# Altium PCB CANDAQ.PcbDoc (part 2 of 2)
Units mm, origin at the board's own origin, x right, y up, seen from the top; angles counter-clockwise.
Board outline 156.2 x 85.4 mm, 2 copper layers (Top Layer, Bottom Layer); 108 components, 143 nets, 695 pads, 135 vias.
Unrouted connection lines stored in the file: 92.
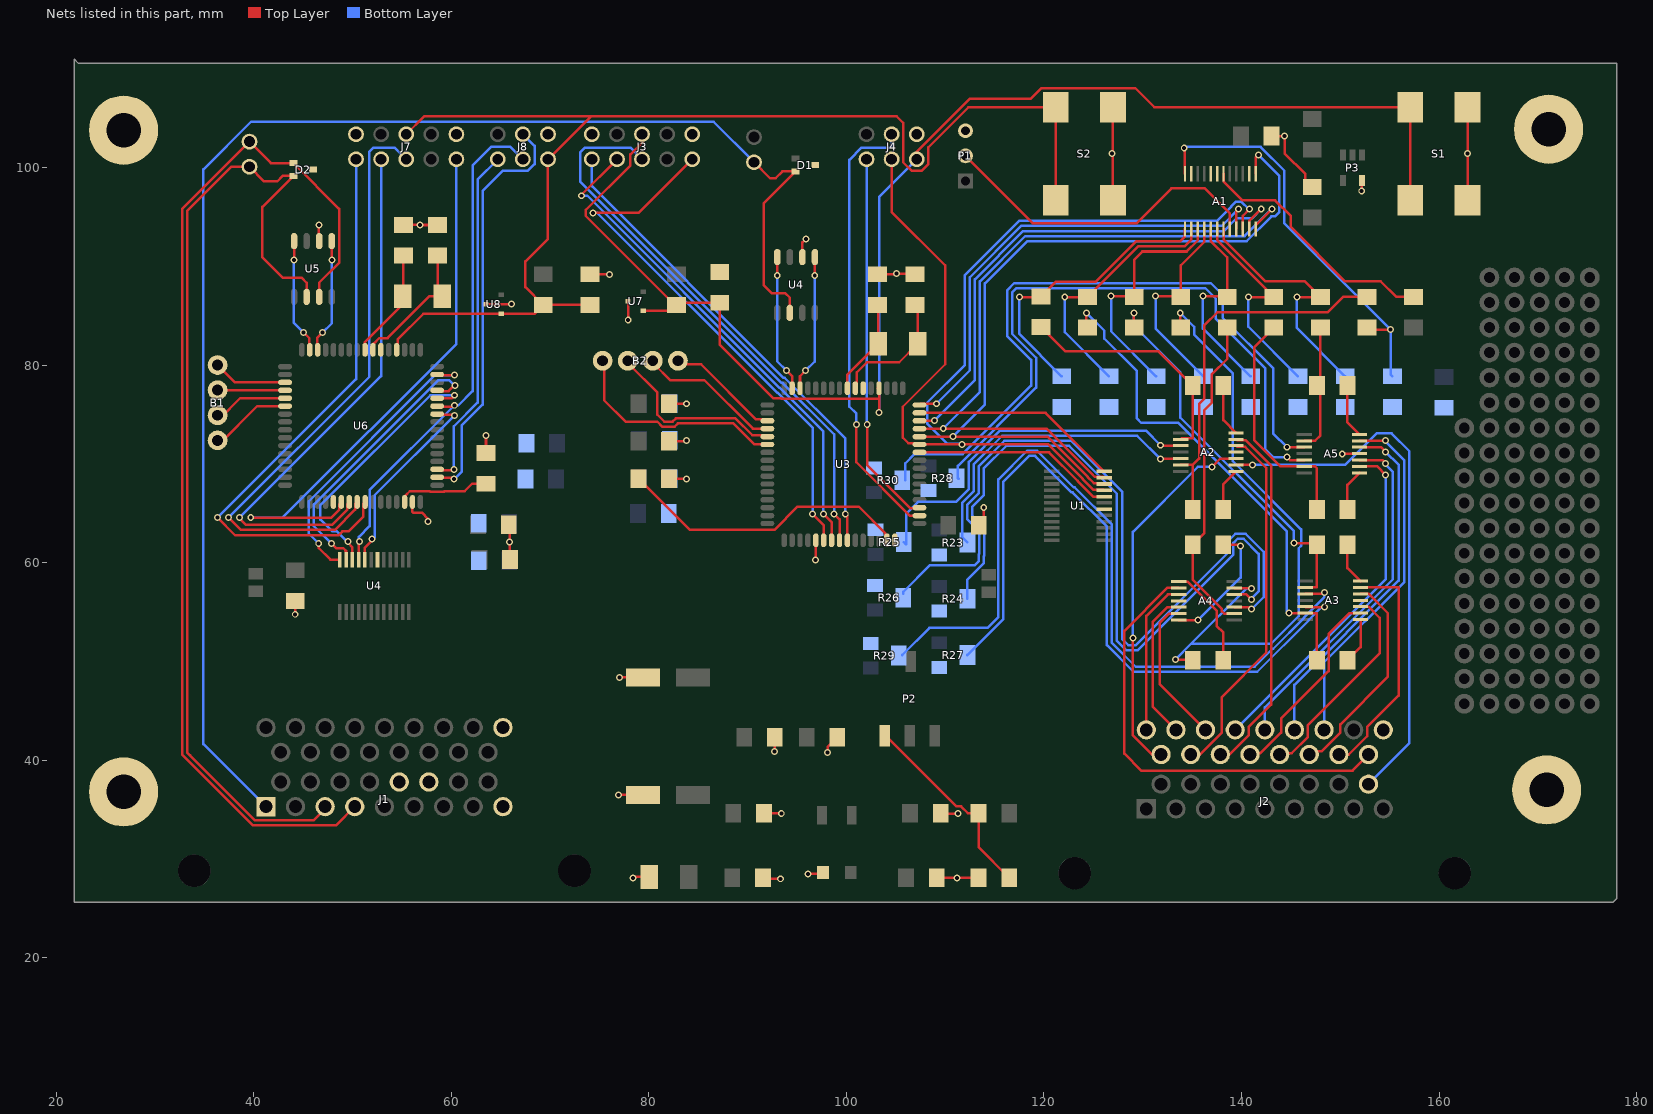
[diagram p2: the nets of this part, all layers, seen from the top]

## Via types
v1: diameter 0.7, hole 0.4, Top Layer to Bottom Layer, 135 vias

## Nets (pads, with @x,y where several pads share a name; then routed paths per layer and width w, separated by ;. In a path a pad name is that pad's centre, name@x,y a point inside that pad or via, vN(x,y) a via of type N, cw(c..) or ccw(c..) an arc to the next point about the centre after c; other vN are vias at no path point) (continued)
CAN_H_2: D2.1 J1.4 J5.1 U5.7 | length 107.7
  Top Layer w0.254: U5.7@46.606,86.92 46.606,88.351 48.627,90.372 48.627,95.834 D2.1@43.993,100.468 41.723,100.468 J5.1@39.548,102.643 32.729,95.824 32.729,40.583 39.87,33.442 48.349,33.442 J1.4@50.213,35.306
CAN_L: D1.2 J1.1 J6.2 U4.6@94.265,85.305 | length 149.3
  Top Layer w0.254: J6.2@90.635,100.559 92.26,98.934 92.821,98.934 93.511,99.624 D1.2@94.842,99.624 91.604,96.386 91.604,88.13 92.428,87.306 93.793,87.306 94.265,86.834 U4.6@94.265,85.305
  Bottom Layer w0.254: J1.1@41.213,35.306 34.883,41.636 34.883,99.831 39.708,104.656 86.538,104.656 J6.2@90.635,100.559
CAN_L_2: D2.2 J1.3 J5.2 U5.6 | length 102.3
  Top Layer w0.254: U5.6@45.336,86.92 45.336,88.354 44.814,88.876 42.911,88.876 40.865,90.922 40.865,96.04 D2.2@43.993,99.168 42.914,99.168 42.36,98.614 41.037,98.614 J5.2@39.548,100.103 37.726,100.103 33.237,95.614 33.237,40.793 33.244,40.793 33.542,40.496 33.542,40.488 40.08,33.95 46.074,33.95 47.006,34.882 47.006,35.099 J1.3@47.213,35.306
CAN_RX: U3.31 U4.4@92.995,90.955 | length 13.9
  Top Layer w0.254: v1(92.993,89.087) 92.995,89.089 U4.4@92.995,90.955 ; v1(93.94,79.452) 94.495,78.897 U3.31@94.495,77.677
  Bottom Layer w0.254: v1(92.993,89.087) 92.993,80.399 v1(93.94,79.452)
CAN_RX_2: U5.4 U6.31 | length 11.7
  Top Layer w0.254: v1(44.049,90.675) 44.066,90.692 U5.4@44.066,92.57 ; v1(45.032,83.315) 45.6,82.747 U6.31@45.6,81.487
  Bottom Layer w0.254: v1(44.049,90.675) 44.049,84.298 v1(45.032,83.315)
CAN_TX: U3.30 U4.1@96.805,90.955 | length 13.9
  Top Layer w0.254: U3.30@95.295,77.677 95.295,78.881 v1(95.866,79.452) ; v1(96.787,89.087) 96.805,89.105 U4.1@96.805,90.955
  Bottom Layer w0.254: v1(95.866,79.452) 96.787,80.373 v1(96.787,89.087)
CAN_TX_2: U5.1 U6.30 | length 11.7
  Top Layer w0.254: U6.30@46.4,81.487 46.4,82.757 v1(46.958,83.315) ; U5.1@47.876,92.57 47.876,90.695 v1(47.896,90.675)
  Bottom Layer w0.254: v1(46.958,83.315) 47.896,84.253 v1(47.896,90.675)
D_0: B2.0 U3.35 | length 11.3
  Top Layer w0.254: B2.0@83.08,80.1 85.278,80.1 90.857,74.521 91.851,74.521 U3.35@91.995,74.377
D_0_2: B1.0 U6.35 | length 7.2
  Top Layer w0.254: B1.0@36.6,79.74 38.081,78.259 U6.35@43.154,78.259
D_1: B2.1 U3.36 | length 14.2
  Top Layer w0.254: B2.1@80.54,80.1 82.14,78.5 85.6,78.5 90.523,73.577 U3.36@91.995,73.577
D_1_2: B1.1 U6.36 | length 6.7
  Top Layer w0.254: B1.1@36.6,77.2 36.859,77.459 U6.36@43.154,77.459
D_2: B2.2 U3.37 | length 18.6
  Top Layer w0.254: B2.2@78,80.1 80.861,77.239 80.861,74.986 81.547,74.3 82.4,74.3 82.721,74.621 88.76,74.621 90.461,72.921 91.851,72.921 U3.37@91.995,72.777
D_2_2: B1.2 U6.37 | length 7.4
  Top Layer w0.254: B1.2@36.6,74.66 38.599,76.659 U6.37@43.154,76.659
D_3: B2.3 U3.38 | length 22.3
  Top Layer w0.254: B2.3@75.46,80.1 75.46,76.458 77.632,74.286 80.843,74.286 81.337,73.792 82.61,73.792 82.932,74.113 88.55,74.113 90.686,71.977 U3.38@91.995,71.977
D_3_2: B1.3 U6.38 | length 8.1
  Top Layer w0.254: B1.3@36.6,72.12 40.339,75.859 U6.38@43.154,75.859
GND: A1.14 A1.19 A1.20 A1.23 A2.4 A3.4 A4.4 A5.4 C3.2 C4.1 C5.1 C6.2 C7.1 C8.1 C9.2 C10.2 C11.1 C12.1 C13.1 C14.2 C15.2 C16.2 C17.2 C18.2 C19.1 C20.1 C21.1 C22.1 C23.1 C24.1 C25.2 C26.1 C27.2 C28.1 C29.1@136.146,75.78 C29.2@113.4,63.8 C30.1 C31.1@145.715,75.78 C31.2@44.196,56.134 C32.2 C33.1 C34.1 C35.2 C36.1 C37.1 C38.2 C39.2 C40.1 C41.1 D1.3 D2.3 D3.2 D4.2 J1.9 J1.14 J1.15 J1.34 J2.34 J3.2 J3.10 J4.6 J7.2 J7.10 J8.6 P1.3 P3.5 pad.95 R3.1 R23.1 R24.1 R25.2 R26.2 R27.1 R28.1 R29.2 R30.2 S1.2 S2.2 U1.18 U3.22 U3.53 U3.63 U4.2@95.535,90.955 U4.18 U5.2 U6.22 U6.53 U6.63 U7.3 U8.3 | length 87.1
  Top Layer w0.254: v1(44.182,54.782) 44.196,54.796 C31.2@44.196,56.134 ; v1(46.582,94.182) 46.582,92.594 U5.2@46.606,92.57 ; C41.1@55.145,94.21 56.821,94.21 v1(56.832,94.2) 58.591,94.2 C40.1@58.601,94.21 ; U6.63@56.054,66.159 56.054,65.165 56.141,65.078 57.004,65.078 57.644,64.438 v1(57.644,64.185) ; C33.1@63.5,71.1 v1(63.5,72.9) ; U8.3@63.5,86.161 66.061,86.161 v1(66.1,86.2) ; C35.2@65.8,63.856 65.9,63.756 v1(65.9,62.1) 65.929,62.071 C34.1@65.929,60.334 ; C32.2@74.041,89.206 75.994,89.206 v1(76,89.2) ; v1(76.9,36.5) 76.91,36.49 C19.1@79.38,36.49 ; v1(77,48.4) 77.01,48.39 C20.1@79.38,48.39 ; U7.3@77.88,86.48 77.9,86.46 v1(77.9,84.6) ; v1(78.4,28.1) 78.49,28.19 D4.2@80.035,28.19 ; C4.1@82.042,68.516 83.784,68.516 v1(83.8,68.5) ; C5.1@82.042,72.305 83.705,72.305 v1(83.8,72.4) ; C6.2@82.042,76.094 83.794,76.094 v1(83.8,76.1) ; C17.2@91.54,28.107 91.647,28 v1(93.3,28) ; C16.2@91.64,34.632 93.368,34.632 v1(93.4,34.6) ; v1(92.7,40.9) 92.74,40.94 C18.2@92.74,42.33 ; U4.2@95.535,90.955 95.535,92.435 v1(95.9,92.8) ; v1(96.1,28.5) 97.51,28.5 D3.2@97.64,28.63 ; v1(96.882,60.282) 96.895,60.295 U3.53@96.895,62.277 ; v1(98.1,40.8) 98.1,41.359 C15.2@99.071,42.33 ; C12.1@103.151,89.206 105.006,89.206 v1(105.082,89.282) 106.858,89.282 C11.1@106.934,89.206 ; C13.1@109.14,28.107 111.193,28.107 v1(111.2,28.1) 113.37,28.1 R3.1@113.377,28.107 ; C14.2@109.54,34.632 109.572,34.6 v1(111.3,34.6) ; C29.2@113.4,63.8 113.9,64.3 v1(113.9,65.6) ; S2.2@126.987,96.724 126.987,101.313 v1(126.872,101.428) 126.987,101.543 S2.2@126.987,106.124 ; C25.2@143.041,103.201 144.345,103.201 v1(144.372,103.228) 144.372,101.445 146.461,99.356 146.461,98.738 C21.1@147.153,98.046 ; v1(150.2,71) 150.25,71.05 A5.4@151.95,71.05 ; v1(152.172,97.628) 152.194,97.65 P3.5@152.194,98.696 ; S1.2@162.886,96.722 S1.2@162.886,106.122
  other v1: 162.872,101.428
ISP_MISO: J4.1 U3.3 | length 38.1
  Top Layer w0.254: v1(102.1,74) 102.1,69.878 106.478,65.5 107.03,65.5 U3.3@107.251,65.721
  Bottom Layer w0.254: J4.1@102.032,100.853 102.032,74.068 v1(102.1,74)
ISP_MISO_2: J8.1 U6.3 | length 35
  Top Layer w0.254: U6.3@58.5,69.387 60.188,69.387 v1(60.252,69.451)
  Bottom Layer w0.254: v1(60.252,69.451) 60.252,73.823 62.652,76.223 62.652,98.811 J8.1@64.694,100.853
ISP_MOSI: J4.4 U3.2 | length 45.7
  Top Layer w0.254: v1(101,74) 101,70.178 106.401,64.777 U3.2@107.395,64.777
  Bottom Layer w0.254: v1(101,74) 101,75.1 100.3,75.8 100.3,100.791 101.543,102.034 104.524,102.034 104.572,102.082 J4.4@104.572,103.393
ISP_MOSI_2: J8.4 U6.2 | length 42.1
  Top Layer w0.254: U6.2@58.5,68.587 60.141,68.587 v1(60.251,68.477)
  Bottom Layer w0.254: v1(60.251,68.477) 60.311,68.477 61.03,69.196 61.03,73.883 63.16,76.013 63.16,97.649 65.183,99.672 67.723,99.672 68.415,100.364 68.415,102.212 J8.4@67.234,103.393
NetA1_1: A1.1 C22.2 R13.1 | length 29.9
  Top Layer w0.254: v1(117.5,86.9) 119.637,86.9 R13.1@119.701,86.964 121.208,88.471 125.255,88.471 129.317,92.533 133.757,92.533 134.278,93.054 A1.1@134.278,93.803
  Bottom Layer w0.254: v1(117.5,86.9) 117.5,83.174 C22.2@121.794,78.88
NetA1_2: A1.2 C26.2 R17.2 | length 26.2
  Top Layer w0.254: v1(122.1,86.9) 124.403,86.9 R17.2@124.416,86.913 129.528,92.025 134.23,92.025 134.928,92.723 A1.2@134.928,93.803
  Bottom Layer w0.254: v1(122.1,86.9) 122.1,83.358 C26.2@126.578,78.88
NetA1_3: A1.3 C28.2 R18.2 | length 24.6
  Top Layer w0.254: v1(126.8,87) 129.044,87 R18.2@129.131,86.913 129.131,90.675 129.973,91.517 134.44,91.517 135.578,92.655 A1.3@135.578,93.803
  Bottom Layer w0.254: v1(126.8,87) 126.8,83.442 C28.2@131.362,78.88
NetA1_4: A1.4 C29.2@136.146,78.88 R19.2 | length 20.6
  Top Layer w0.254: v1(131.3,87) 133.759,87 R19.2@133.846,86.913 133.846,90.11 136.228,92.492 A1.4@136.228,93.803
  Bottom Layer w0.254: v1(131.3,87) 131.3,83.726 C29.2@136.146,78.88
NetA1_5: A1.5 C30.2 R20.2 | length 20.2
  Top Layer w0.254: v1(136.1,87) 138.473,87 R20.2@138.561,86.913 138.561,90.909 136.878,92.592 A1.5@136.878,93.803
  Bottom Layer w0.254: v1(136.1,87) 136.1,83.71 C30.2@140.93,78.88
NetA1_6: A1.6 C31.2@145.715,78.88 R21.2 | length 21.9
  Top Layer w0.254: A1.6@137.528,93.803 137.528,92.66 R21.2@143.275,86.913 143.262,86.9 v1(140.7,86.9)
  Bottom Layer w0.254: v1(140.7,86.9) 140.7,83.895 C31.2@145.715,78.88
NetA1_7: A1.7 C24.2 R16.2 | length 25.7
  Top Layer w0.254: A1.7@138.178,93.803 138.178,92.729 142.418,88.489 146.414,88.489 R16.2@147.99,86.913 147.977,86.9 v1(145.6,86.9)
  Bottom Layer w0.254: v1(145.6,86.9) 145.6,83.779 C24.2@150.499,78.88
NetA1_18: A1.18 R15.2 | length 25.5
  Top Layer w0.254: A1.18@138.178,99.403 138.178,98.614 140.094,96.698 143.402,96.698 145,95.1 145,94 150.5,88.5 154.1,88.5 155.687,86.913 R15.2@157.42,86.913
NetA1_24: A1.24 C23.2 R14.1 | length 41.5
  Top Layer w0.254: v1(134.2,102) 134.278,101.922 A1.24@134.278,99.403 ; R14.1@152.705,83.813 152.918,83.6 v1(155.1,83.6)
  Bottom Layer w0.254: v1@134.3,102.1 141.934,102.1 144.339,99.695 144.339,94.361 v1(155.1,83.6) 155.1,79.063 C23.2@155.283,78.88
NetA2_1: A2.1 R4.2 | length 4.4
  Top Layer w0.254: R4.2@138.159,65.401 138.159,67.959 A2.1@139.45,69.25
NetA2_7: A2.7 R6.2 | length 5.3
  Top Layer w0.254: R6.2@138.159,77.947 138.159,74.441 A2.7@139.45,73.15
NetA3_1: A3.1 R8.2 | length 4.7
  Top Layer w0.254: R8.2@150.732,50.134 152.05,51.452 A3.1@152.05,54.25
NetA3_7: A3.7 R10.2 | length 4.2
  Top Layer w0.254: R10.2@150.732,61.818 150.732,59.468 A3.7@152.05,58.15
NetA4_1: A4.1 R5.2 | length 10.4
  Top Layer w0.254: A4.1@133.65,58.1 134.532,58.1 137.486,55.147 137.486,53.591 138.159,52.918 R5.2@138.159,50.134
NetA4_7: A4.7 R7.2 | length 13
  Top Layer w0.254: A4.7@133.65,54.2 v1(135.6,54.2) ; R7.2@138.159,61.818 139.782,61.818 v1(139.9,61.7)
  Bottom Layer w0.254: v1(135.6,54.2) 139.9,58.5 v1(139.9,61.7)
NetA5_1: A5.1 R9.2 | length 4.2
  Top Layer w0.254: R9.2@150.732,65.401 150.732,67.882 A5.1@151.95,69.1
NetA5_7: A5.7 R11.2 | length 5.5
  Top Layer w0.254: R11.2@150.732,77.947 150.732,74.218 A5.7@151.95,73
NetC4_2: C4.2 U3.62 | length 30
  Top Layer w0.254: C4.2@78.942,68.516 84.137,63.321 92.692,63.321 95.053,65.682 101.243,65.682 103.951,62.974 103.951,62.421 U3.62@104.095,62.277
NetC11_2: C11.2 U3.23 X1.1 | length 13.2
  Top Layer w0.254: U3.23@100.895,77.677 101.039,77.677 101.039,79.279 102.06,80.3 105.342,80.3 X1.1@107.211,82.169 107.211,85.829 C11.2@106.934,86.106
NetC12_2: C12.2 U3.24 X1.2 | length 9.7
  Top Layer w0.254: U3.24@100.095,77.677 100.095,79.053 X1.2@103.211,82.169 103.211,86.046 C12.2@103.151,86.106
NetC33_2: C33.2 U6.62 | length 9.4
  Top Layer w0.254: U6.62@55.254,66.159 55.398,66.303 55.398,66.856 55.782,67.24 57.82,67.24 57.857,67.203 59.251,67.203 59.288,67.24 61.337,67.24 62.097,68 C33.2@63.5,68
NetC40_2: C40.2 U6.23 X2.1 | length 14.1
  Top Layer w0.254: U6.23@52,81.487 52.144,81.487 52.144,82.202 52.694,82.752 53.541,82.752 57.784,86.995 X2.1@59.078,86.995 58.601,87.472 C40.2@58.601,91.11
NetC41_2: C41.2 U6.24 X2.2 | length 11.3
  Top Layer w0.254: U6.24@51.2,81.487 51.2,82.31 55.078,86.188 X2.2@55.078,86.995 55.145,87.062 C41.2@55.145,91.11
NetP2_1: P2.1 R2.1 R3.2 | length 20.6
  Top Layer w0.254: P2.1@103.86,42.5 103.961,42.5 111.13,35.331 111.603,35.331 112.302,34.632 R2.1@113.377,34.632 113.377,31.207 R3.2@116.477,28.107
REF_0: A2.12 R23.3 | length 31.8
  Top Layer w0.254: v1(131.8,70.5) 131.85,70.55 A2.12@133.85,70.55
  Bottom Layer w0.254: R23.3@112.25,62.06 111.7,62.61 111.7,66.053 112.908,67.261 112.908,69.996 115.775,72.863 129.437,72.863 v1(131.8,70.5)
REF_1: A2.10 R25.3 | length 37
  Top Layer w0.254: v1(131.8,71.9) 131.85,71.85 A2.10@133.85,71.85
  Bottom Layer w0.254: R25.3@105.8,62.1 106.04,61.86 106.04,64.94 107.3,66.2 111.129,66.2 112.4,67.471 112.4,70.206 115.565,73.371 130.329,73.371 v1(131.8,71.9)
REF_2: A3.12 R27.3 | length 73.5
  Top Layer w0.254: A3.12@146.45,55.55 146.5,55.5 v1(148.4,55.5)
  Bottom Layer w0.254: R27.3@112.25,50.66 115.892,54.302 115.892,68.226 118.497,70.831 119.103,70.831 122.803,67.131 122.903,67.131 126.376,63.658 126.376,51.669 129.084,48.961 141.598,48.961 146.816,54.179 146.816,54.231 148.085,55.5 v1(148.4,55.5)
REF_3: A3.10 R29.3 | length 81
  Top Layer w0.254: A3.10@146.45,56.85 148.25,56.85 v1(148.4,57)
  Bottom Layer w0.254: R29.3@105.65,50.66 108.39,53.4 114.272,53.4 115.384,54.512 115.384,68.436 118.287,71.339 119.313,71.339 123.013,67.639 123.113,67.639 126.884,63.868 126.884,51.879 129.294,49.469 141.335,49.469 143.158,51.292 143.21,51.292 146.308,54.39 146.308,54.442 148.4,56.534 v1(148.4,57)
REF_4: A4.12 R24.3 | length 73.8
  Top Layer w0.254: A4.12@139.25,56.8 140.5,56.8 v1(141,56.3)
  Bottom Layer w0.254: R24.3@112.25,56.36 112.25,58.298 113.908,59.956 113.908,60.661 113.939,60.692 113.939,63.561 112.716,64.784 112.716,65.632 113.924,66.84 113.924,69.575 116.196,71.847 122.535,71.847 127.392,66.99 127.392,52.09 128.321,51.161 129.513,51.161 139.169,60.817 139.169,62.003 139.597,62.431 140.203,62.431 141.731,60.903 141.731,57.097 141,56.366 v1(141,56.3)
REF_5: A4.10 R26.3 | length 81.3
  Top Layer w0.254: A4.10@139.25,55.5 140.8,55.5 v1(141,55.3)
  Bottom Layer w0.254: R26.3@105.75,56.85 105.75,57.05 108.469,59.769 113.002,59.769 113.4,60.167 113.4,60.871 113.431,60.902 113.431,63.218 112.208,64.441 112.208,65.842 113.416,67.05 113.416,69.786 115.985,72.355 122.745,72.355 127.9,67.2 127.9,52.3 128.531,51.669 129.303,51.669 138.661,61.027 138.661,62.213 139.387,62.939 140.413,62.939 142.239,61.113 142.239,56.505 141.034,55.3 v1(141,55.3)
REF_6: A5.12 R28.3 | length 66.1
  Top Layer w0.254: v1(144.6,70.7) 144.9,70.4 A5.12@146.35,70.4
  Bottom Layer w0.254: R28.3@111.353,68.5 111.293,68.56 111.293,69.817 119.2,77.725 119.2,80.756 116.769,83.187 116.769,87.375 117.197,87.803 136.331,87.803 137.4,86.734 137.4,84.699 142.4,79.699 142.4,71.5 143.2,70.7 v1(144.6,70.7)
REF_7: A5.10 R30.3 | length 70.8
  Top Layer w0.254: v1(144.6,71.7) A5.10@146.35,71.7
  Bottom Layer w0.254: R30.3@105.95,68.36 105.95,70.05 106.9,71 111.757,71 118.692,77.935 118.692,80.545 116.261,82.976 116.261,87.585 116.987,88.311 136.889,88.311 138.1,87.1 138.1,84.8 143.2,79.7 143.2,73.1 v1(144.6,71.7)
RESET: C3.1 J3.6 J4.5 R1.2 S1.1 U3.20 U7.1 | length 147.7
  Top Layer w0.254: J3.6@79.299,103.393 79.299,102.523 78.118,101.342 78.118,100.24 73.603,95.725 73.603,95.119 82.612,86.11 R1.2@82.78,86.11 ; U7.1@79.43,85.52 82.19,85.52 R1.2@82.78,86.11 ; 103.151,76.596 93.423,76.596 93.386,76.633 92.606,76.633 87.16,82.079 C3.1@87.16,86.33 83,86.33 R1.2@82.78,86.11 ; U3.20@103.151,77.677 U3.20@103.295,77.677 103.295,75.205 v1(103.3,75.2) ; J4.5@107.112,100.853 107.112,101.612 112.5,107 118.674,107 119.729,108.055 129.245,108.055 131.178,106.122 S1.1@157.086,106.122 S1.1@157.086,96.722
  Bottom Layer w0.254: v1@103.3,75.1 v1(103.3,75.2) 103.3,97.041 J4.5@107.112,100.853
RESET_2: C32.1 J7.6 J8.5 R22.2 S2.1 U6.20 U8.1 | length 128.9
  Top Layer w0.254: U6.20@54.4,81.487 54.544,81.631 54.544,82.599 57.146,85.201 U8.1@65.05,85.201 68.394,85.201 R22.2@69.299,86.106 ; J7.6@55.423,103.393 57.23,105.2 74.121,105.2 ; C32.1@74.041,86.106 R22.2@69.299,86.106 ; S2.1@121.187,96.724 S2.1@121.187,106.124 112.342,106.124 108.293,102.075 108.293,100.364 107.601,99.672 106.623,99.672 105.753,100.542 105.753,104.535 105.088,105.2 74.121,105.2 ; R22.2@69.299,86.106 67.491,87.914 67.491,90.516 69.774,92.799 J8.5@69.774,100.853 74.121,105.2
SG_0_0: A2.2 J2.17 | length 55.1
  Top Layer w0.254: A2.2@139.45,69.9 v1(141.1,69.9)
  Bottom Layer w0.254: v1(141.1,69.9) 150.5,69.9 153.731,73.131 154.903,73.131 154.934,73.1 155.2,73.1 157.008,71.292 157.008,41.728 J2.17@152.86,37.58
SG_0_2: A2.3 J2.18 | length 37.8
  Top Layer w0.254: v1(129,52.4) 129,42.522 130.942,40.58 J2.18@131.86,40.58 ; v1(137,69.7) 137.85,70.55 A2.3@139.45,70.55
  Bottom Layer w0.254: v1(129,52.4) 129,63.134 135.566,69.7 v1(137,69.7)
SG_1_0: A2.5 J2.19 | length 36.7
  Top Layer w0.254: J2.19@134.86,40.58 135.78,40.58 138.004,42.804 138.004,46.4 142.492,50.888 142.492,69.622 140.383,71.731 139.569,71.731 A2.5@139.45,71.85
SG_1_1: A2.6 J2.20 | length 36.6
  Top Layer w0.254: J2.20@137.86,40.58 138.778,40.58 140.716,42.518 140.716,43.354 143,45.638 143,69.832 140.451,72.381 139.569,72.381 A2.6@139.45,72.5
SG_2_0: A3.2 J2.21 | length 20.4
  Top Layer w0.254: J2.21@140.86,40.58 140.716,40.724 141.922,40.724 144.004,42.806 144.004,44.218 148.813,49.026 148.813,52.767 150.945,54.9 A3.2@152.05,54.9
SG_2_1: A3.3 J2.22 | length 21.1
  Top Layer w0.254: J2.22@143.86,40.58 143.86,40.71 145.072,40.71 146.716,42.354 146.716,43.566 153.98,50.83 153.98,54.434 152.864,55.55 A3.3@152.05,55.55
SG_3_0: A3.5 J2.23 | length 21.8
  Top Layer w0.254: J2.23@146.86,40.58 147.181,40.901 148.099,40.901 150.004,42.806 150.004,43.642 154.828,48.466 154.828,54.886 152.841,56.873 152.073,56.873 A3.5@152.05,56.85
SG_3_1: A3.6 J2.24 | length 23.9
  Top Layer w0.254: J2.24@149.86,40.58 150.86,40.58 152.716,42.436 152.716,43.354 155.907,46.545 155.907,57.5 A3.6@152.05,57.5
SG_4_0: A4.2 J2.25 | length 45.9
  Top Layer w0.254: A4.2@133.65,57.45 132.477,57.45 128.132,53.105 128.132,40.668 129.839,38.961 151.241,38.961 J2.25@152.86,40.58
SG_4_1: A4.3 J2.26 | length 15.7
  Top Layer w0.254: J2.26@130.36,43.08 130.36,54.615 132.545,56.8 A4.3@133.65,56.8
SG_5_0: A4.5 J2.27 | length 15.2
  Top Layer w0.254: J2.27@133.36,43.08 131,45.44 131,54 132.5,55.5 A4.5@133.65,55.5
SG_5_1: A4.6 J2.28 | length 15.1
  Top Layer w0.254: A4.6@133.65,54.85 132.65,54.85 131.7,53.9 131.7,47.74 J2.28@136.36,43.08
SG_6_0: A5.2 J2.29 | length 35.1
  Top Layer w0.254: A5.2@151.95,69.75 153.75,69.75 v1(154.6,68.9)
  Bottom Layer w0.254: J2.29@139.36,43.08 154.6,58.32 v1(154.6,68.9)
SG_6_1: A5.3 J2.30 | length 35.5
  Top Layer w0.254: A5.3@151.95,70.4 154.267,70.4 v1(154.6,70.067)
  Bottom Layer w0.254: J2.30@142.36,43.08 142.36,45.362 155.331,58.333 155.331,69.203 154.6,69.934 v1(154.6,70.067)
SG_7_0: A5.5 J2.31 | length 35.9
  Top Layer w0.254: A5.5@151.95,71.7 154.133,71.7 v1(154.6,71.233)
  Bottom Layer w0.254: J2.31@145.36,43.08 145.36,47.643 155.9,58.183 155.9,69.933 v1(154.6,71.233)
SG_7_1: A5.6 J2.32 | length 36.1
  Top Layer w0.254: A5.6@151.95,72.35 154.55,72.35 v1(154.6,72.4)
  Bottom Layer w0.254: J2.32@148.36,43.08 148.36,49.925 156.5,58.065 156.5,70.367 154.6,72.267 v1(154.6,72.4)
SG_ADC_0: A2.13 R4.1 R14.2 | length 38
  Top Layer w0.254: A2.13@133.85,69.9 135.059,69.9 ; R4.1@135.059,65.401 135.059,69.9 ; R14.2@152.705,86.913 150.279,86.913 148.725,85.359 137.541,85.359 136.24,84.058 136.24,76.616 135.7,76.076 135.7,70.541 135.059,69.9
SG_ADC_1: A2.9 R6.1 R13.2 | length 24.4
  Top Layer w0.254: R13.2@119.701,83.864 122.165,81.4 131.606,81.4 R6.1@135.059,77.947 135.059,72.619 133.969,72.619 A2.9@133.85,72.5
SG_ADC_2: A3.13 R8.1 R17.1 | length 50.2
  Top Layer w0.254: v1(124.3,85.3) 124.3,83.929 R17.1@124.416,83.813 ; v1(144.8,54.9) A3.13@146.45,54.9 147.632,54.9 R8.1@147.632,50.134
  Bottom Layer w0.254: v1(124.3,85.3) 126.1,83.5 126.1,82.7 129.4,79.4 129.4,74.624 129.852,74.172 133.61,74.172 144.569,63.213 144.569,55.131 v1(144.8,54.9)
SG_ADC_3: A3.9 R10.1 R18.1 | length 39.4
  Top Layer w0.254: v1(129.1,85.3) 129.1,83.844 R18.1@129.131,83.813 ; v1(145.3,62) 147.45,62 R10.1@147.632,61.818 147.632,57.5 A3.9@146.45,57.5
  Bottom Layer w0.254: v1(129.1,85.3) 129.1,84 133.8,79.3 133.8,74.7 145.3,63.2 v1(145.3,62)
SG_ADC_4: A4.13 R5.1 R19.1 | length 63.7
  Top Layer w0.254: v1(133.3,50.2) 134.993,50.2 R5.1@135.059,50.134 ; v1(133.8,85.3) 133.8,83.859 R19.1@133.846,83.813 ; A4.13@139.25,57.45 139.3,57.4 v1(141,57.4)
  Bottom Layer w0.254: v1(133.3,50.2) 134.9,51.8 ; v1(133.8,85.3) 135.2,83.9 135.2,83.1 139.122,79.178 139.122,70.278 146.031,63.369 146.031,61.697 145.8,61.466 145.8,54.6 143,51.8 134.9,51.8 ; v1(141,57.4) 140.5,57.4 134.9,51.8
SG_ADC_5: A4.9 R7.1 R20.1 | length 32.8
  Top Layer w0.254: R20.1@138.561,83.813 138.561,80.638 136.978,79.055 136.978,76.178 136.208,75.408 136.208,66.54 136.24,66.509 136.24,62.999 R7.1@135.059,61.818 135.059,58.292 137.994,55.357 137.994,55.106 138.25,54.85 A4.9@139.25,54.85
SG_ADC_6: A5.13 R9.1 R21.1 | length 23.9
  Top Layer w0.254: R21.1@143.275,83.813 141.3,81.838 141.3,72.4 143.95,69.75 A5.13@146.35,69.75 147.455,69.75 147.632,69.573 R9.1@147.632,65.401
SG_ADC_7: A5.9 R11.1 R16.1 | length 13.1
  Top Layer w0.254: A5.9@146.35,72.35 147.455,72.35 147.984,72.879 147.984,77.595 R11.1@147.632,77.947 147.99,78.306 R16.1@147.99,83.813
SG_ADC_\R\E\S\E\T\: A1.8 P1.2 | length 33.7
  Top Layer w0.254: P1.2@112.05,101.2 118.85,94.4 129.4,94.4 132.9,97.9 136.3,97.9 138.828,95.372 A1.8@138.828,93.803
SPI_EOC_0: U1.24 U3.15 | length 21.2
  Top Layer w0.254: U3.15@107.395,75.177 120.168,75.177 U1.24@126.1,69.245
SPI_EOC_0_2: U4.24 U6.15 | length 29.6
  Top Layer w0.254: v1(46.561,61.948) 46.561,61.489 47.738,60.312 U4.24@48.704,60.312 ; U6.15@58.5,78.987 60.287,78.987 v1(60.3,79)
  Bottom Layer w0.254: v1(46.561,61.948) 45.572,62.937 45.572,66.222 45.575,66.225 58.35,79 v1(60.3,79)
SPI_EOC_1: A1.9 U3.16 | length 48.1
  Top Layer w0.254: U3.16@107.395,75.977 107.518,76.1 v1(109.1,76.1) ; A1.9@139.478,93.803 139.478,95.578 v1(139.7,95.8)
  Bottom Layer w0.254: v1(109.1,76.1) 112.492,79.492 112.492,88.91 117.682,94.1 138,94.1 v1(139.7,95.8)
SPI_MISO: A1.12 U1.23 U3.13 | length 72.7
  Top Layer w0.254: U3.13@107.395,73.577 v1(109.8,73.577) 120.273,73.577 124.919,68.931 124.919,68.909 125.142,68.686 126.024,68.686 U1.23@126.1,68.61 ; A1.12@141.43,93.593 141.43,94.13 v1(143.1,95.8)
  Bottom Layer w0.254: v1(109.8,73.577) 113.508,77.285 113.508,88.49 118.102,93.084 140.318,93.084 143.034,95.8 v1(143.1,95.8)
SPI_MISO_2: U4.23 U6.13 | length 29.1
  Top Layer w0.254: v1@47.85,61.96 48.317,61.493 49.04,61.493 49.263,61.27 49.263,61.195 49.34,61.195 U4.23@49.34,60.312 ; U6.13@58.5,77.387 59.716,77.387 60.307,77.978 60.345,77.94 v1(60.37,77.94)
  Bottom Layer w0.254: v1@47.74,62.04 46.08,63.7 46.08,65.9 58.672,78.492 59.774,78.492 60.326,77.94 v1(60.37,77.94)
  other v1: 47.85,61.948
SPI_MOSI: A1.13 U1.22 U3.12 | length 79
  Top Layer w0.254: U3.12@107.395,72.777 120.355,72.777 124.411,68.721 124.411,68.699 125.059,68.051 126.024,68.051 U1.22@126.1,67.975 ; A1.13@141.428,99.403 141.428,101.028 v1(141.7,101.3)
  Bottom Layer w0.254: v1(110.8,72.8) 114.016,76.016 114.016,88.279 118.313,92.576 140.528,92.576 143.021,95.069 143.403,95.069 143.831,95.497 143.831,99.169 v1(141.7,101.3)
SPI_MOSI_2: U4.22 U6.12 | length 27.4
  Top Layer w0.254: v1@49.51,62.026 49.974,61.562 U4.22@49.974,60.312 ; U6.12@58.5,76.587 58.59,76.677 60.04,76.677 v1(60.325,76.962)
  Bottom Layer w0.254: v1(49.516,62.154) 49.516,62.053 48.398,63.171 47.941,63.171 46.74,64.372 46.74,65.842 57.86,76.962 v1(60.325,76.962)
SPI_SCK: A1.10 J4.3 U1.21 U3.11 | length 110.4
  Top Layer w0.254: J4.3@104.572,100.853 104.572,95.528 110,90.1 110,80.1 105.7,75.8 105.7,72.678 106.257,72.121 107.251,72.121 U3.11@107.395,71.977 v1(111.7,71.977) 120.436,71.977 123.903,68.511 123.903,68.489 124.975,67.416 126.024,67.416 U1.21@126.1,67.34 ; A1.10@140.13,93.737 140.13,95.13 v1(140.8,95.8)
  Bottom Layer w0.254: v1(111.7,71.977) 111.608,72.069 110.197,72.069 108.169,74.097 108.169,76.203 111.984,80.018 111.984,89.121 117.471,94.608 137.508,94.608 138.969,96.069 138.969,96.103 139.397,96.531 140.003,96.531 140.734,95.8 v1(140.8,95.8)
SPI_SCK_2: J8.3 U4.21 U6.11 | length 53.2
  Top Layer w0.254: U4.21@50.609,60.312 v1@50.609,61.94 ; U6.11@58.5,75.787 60.166,75.787 v1(60.325,75.946)
  Bottom Layer w0.254: v1@50.62,61.95 50.62,62.615 51.72,63.715 51.72,67.359 60.307,75.946 v1(60.325,75.946) 60.705,75.946 62.144,77.385 62.144,100.233 64.019,102.108 65.979,102.108 J8.3@67.234,100.853
  other v1: 50.69,62.15
SPI_SS_0: U1.20 U3.10 | length 20.6
  Top Layer w0.254: U3.10@107.395,71.177 120.518,71.177 123.395,68.3 123.395,68.278 124.968,66.705 U1.20@126.1,66.705
SPI_SS_0_2: U4.20 U6.10 | length 20.4
  Top Layer w0.254: U4.20@51.244,60.312 51.244,61.541 52.02,62.316 51.977,62.359 v1(51.977,62.39) ; U6.10@58.5,74.987 60.268,74.987 v1(60.325,74.93)
  Bottom Layer w0.254: v1@52.02,62.497 51.977,62.454 v1(51.977,62.39) 52.02,62.39 52.228,62.598 52.228,66.833 v1(60.325,74.93)
SPI_SS_1: A1.11 U3.14 | length 52
  Top Layer w0.254: U3.14@107.395,74.377 107.418,74.4 v1(108.9,74.4) ; A1.11@140.778,93.803 140.778,94.592 141.986,95.8 v1(142,95.8)
  Bottom Layer w0.254: v1(108.9,74.4) 113,78.5 113,88.7 117.892,93.592 138.21,93.592 139.518,94.9 141.1,94.9 v1(142,95.8)
TCK: J3.1 U3.57 | length 49.4
  Top Layer w0.254: v1(99.881,64.951) 100.095,64.737 U3.57@100.095,62.277
  Bottom Layer w0.254: J3.1@74.219,100.853 74.219,98.139 93.637,78.721 93.751,78.721 99.881,72.591 v1(99.881,64.951)
TCK_2: J7.1 U6.57 | length 59.9
  Top Layer w0.254: v1(36.31,64.57) 38.109,62.771 48.567,62.771 48.967,63.171 49.582,63.171 51.056,64.645 51.056,65.943 U6.57@51.2,66.087
  Bottom Layer w0.254: v1(36.31,64.57) 50.343,78.603 J7.1@50.343,100.853
TDI: J3.9 U3.54 | length 55.4
  Top Layer w0.254: v1(74.334,95.422) 78.948,95.422 J3.9@84.379,100.853 ; v1(96.573,64.926) 97.695,63.804 U3.54@97.695,62.277
  Bottom Layer w0.254: v1(74.334,95.422) 74.741,95.422 74.761,95.442 93.006,77.197 93.051,77.197 96.573,73.675 v1(96.573,64.926)
TDI_2: J7.9 U6.54 | length 56.9
  Top Layer w0.254: v1(39.681,64.57) 47.836,64.57 48.656,65.39 48.656,65.943 U6.54@48.8,66.087
  Bottom Layer w0.254: v1(39.681,64.57) 42.911,64.57 60.503,82.162 J7.9@60.503,100.853
TDO: J3.3 U3.55 | length 51.1
  Top Layer w0.254: v1(73.16,97.162) 73.068,97.162 J3.3@76.759,100.853 ; v1(97.656,64.951) 98.495,64.112 U3.55@98.495,62.277
  Bottom Layer w0.254: v1(73.16,97.162) 73.759,97.162 93.216,77.705 93.261,77.705 97.656,73.31 v1(97.656,64.951)
TDO_2: J7.3 U6.55 | length 54.9
  Top Layer w0.254: v1(38.557,64.57) 38.557,64.489 39.207,63.839 47.905,63.839 49.456,65.39 49.456,65.943 U6.55@49.6,66.087
  Bottom Layer w0.254: v1(38.557,64.57) 52.883,78.896 J7.3@52.883,100.853
TMS: J3.5 U3.56 | length 57.2
  Top Layer w0.254: v1(98.74,64.951) 99.295,64.396 U3.56@99.295,62.277
  Bottom Layer w0.254: J3.5@79.299,100.853 78.118,102.034 73.526,102.034 73.038,101.546 73.038,98.602 93.427,78.213 93.541,78.213 98.74,73.014 v1(98.74,64.951)
TMS_2: J7.5 U6.56 | length 62.3
  Top Layer w0.254: v1(37.434,64.57) 37.442,64.57 38.681,63.331 48.197,63.331 50.256,65.39 50.256,65.943 U6.56@50.4,66.087
  Bottom Layer w0.254: v1(37.434,64.57) 51.702,78.838 51.702,101.636 52.1,102.034 54.242,102.034 J7.5@55.423,100.853
pads on no net: A1.21 A1.22 A2.8 A2.14 A3.8 A3.14 A4.8 A4.14 A5.8 A5.14 J1.16 J1.None J2.None J3.8 J7.8 P3.1 P3.2 P3.3 U3.1 U3.4 U3.5 U3.6 U3.7 U3.8 U3.9 U3.17 U3.18 U3.19 U3.25 U3.26 U3.27 U3.28 U3.29 U3.32 U3.33 U3.34 U3.39 U3.40 U3.41 U3.42 U3.43 U3.44 U3.45 U3.46 U3.47 U3.48 U3.49 U3.50 U3.58 U3.59 U3.60 U3.61 U4.5@92.995,85.305 U4.8@96.805,85.305 U5.5 U5.8 U6.1 U6.4 U6.5 U6.6 U6.7 U6.8 U6.9 U6.14 U6.16 U6.17 U6.18 U6.19 U6.25 U6.26 U6.27 U6.28 U6.29 U6.32 U6.33 U6.34 U6.39 U6.40 U6.41 U6.42 U6.43 U6.44 U6.45 U6.46 U6.47 U6.48 U6.49 U6.50 U6.51

## Polygon pours and split planes (outlines as drawn)
+5V_A on Top Layer "Top Layer-+5V_A" (solid, pour order 48): 105.1,111.6 104.95,111.45 104.95,58.15 117.062,58.15 117.312,57.9 117.2,57.788 117.2,25.8 117.6,25.4 178.2,25.4 178.2,111 177.5,111.7 105.1,111.7
+5V on Top Layer "Top Layer-+5V" (solid, pour order 44): 60.4,25.45 60.35,25.4 21.7,25.4 21.7,107.7 21.7,111 26,111 104.8,111 104.8,58.5 104.7,58.4 105.2,57.9 117.312,57.9 117.312,26.813 118.525,25.6 25.5,25.6
+VBAT on Top Layer "Top Layer-+VBAT" (solid, pour order 22): 60.4,52.3 60.4,25.45 98.9,25.45 98.9,39.4 87.8,39.4 87.8,52.3
no net on Top Layer "Top Layer-No Net" (solid, pour order 40): 99.8,57.9
no net on Top Layer "Top Layer-No Net 1" (solid, pour order 38): 40.2,58.885
no net on Top Layer "Top Layer-No Net 2" (solid, pour order 36): 44.4,66.9
no net on Top Layer "Top Layer-No Net 3" (solid, pour order 30): 25.5,61.7
no net on Top Layer "Top Layer-No Net 4" (solid, pour order 26): 67.5,45.6
no net on Top Layer "Top Layer-No Net 5" (solid, pour order 24): 67.5,45.6
no net on Top Layer "Top Layer-No Net 6" (solid, pour order 0): 87.03,52.89
GND on Bottom Layer "Bottom Layer-GND" (solid, pour order 46): 21.8,111 21.805,108.188 21.805,23.088 177.905,23.088 178.105,23.288 178.105,111

## Keep-outs
Keep-Out Layer:
  the board outline again, w1.2

## Silkscreen, mask and mechanical layers (free items; w line width, h text height)
Top Overlay:
  text "AVR_1" at 101.3,96.6 h1.52
  text "CAN_0" at 35.4,96.5 h1.52
  text "JTAG_0" at 51.7,96.5 h1.52
  text "AVR_0" at 64,96.5 h1.52
  text "JTAG_1" at 75.858,96.5 h1.52
  text "CAN_1" at 87.6,96.5 h1.52
  text "SG_RESET" at 115.7,96.4 h1.52 r90
Bottom Overlay:
  rectangle: 105.152,86.4 163.752,88.2
  rectangle: 105.152,101.8 163.752,103.6
  rectangle: 86.7,28.1 114.4,29.5
  rectangle: 86.7,43.1 114.4,44.5
  text "UVIC FORMULA MOTORSPORT" at 163.452,104.6 h2
  text "CANDAQ" at 163.752,88.2 h10
  text "DATA AQUISITION BOARD / UV19/ECE499 / REV A       JULY 2018 / E.WILSON" at 114.5,31.6 h1.52

## Text inside footprints (layer, text, board x,y; h text height)
C15: Top Overlay "+" at 96.071,44.13 h1
C18: Top Overlay "+" at 89.74,44.13 h1
C25: Top Overlay "+" at 140.041,105.001 h1
C27: Bottom Overlay "+" at 158.7,78.7 h1 r90
C29: Top Overlay "+" at 110.4,65.6 h1
C31: Top Overlay "+" at 45.996,59.134 h1 r270